# Altium PCB PCB1.PcbDoc (part 3 of 3)
Units mm, origin at the board's own origin, x right, y up, seen from the top; angles counter-clockwise.
Board outline 201 x 61 mm, 2 copper layers (Top Layer, Bottom Layer); 203 components, 113 nets, 551 pads, 592 vias.
Unrouted connection lines stored in the file: 16.
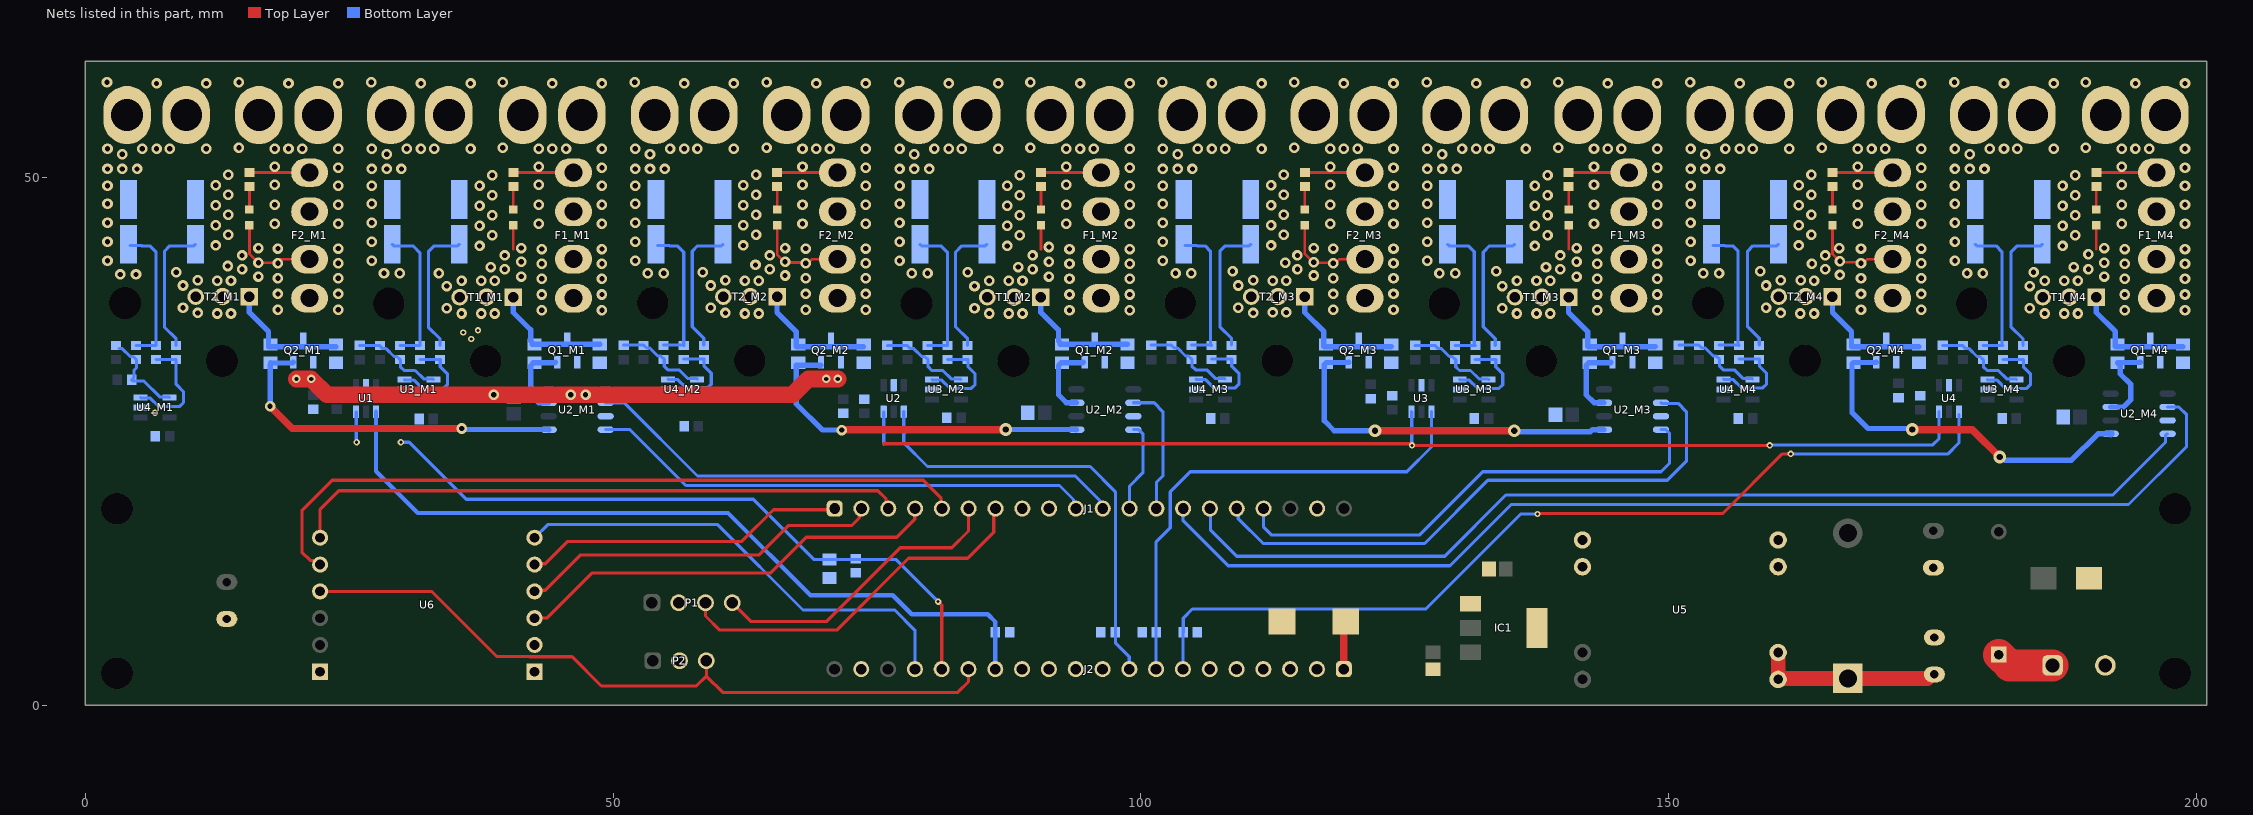
[diagram p2: the nets of this part, all layers, seen from the top]

## Via types
v1: diameter 1, hole 0.5, Top Layer to Bottom Layer, 557 vias
v2: diameter 0.6, hole 0.3, Top Layer to Bottom Layer, 26 vias
v3: diameter 1.2, hole 0.6, Top Layer to Bottom Layer, 5 vias
v4: diameter 0.8, hole 0.4, Top Layer to Bottom Layer, 4 vias

## Nets (pads, with @x,y where several pads share a name; then routed paths per layer and width w, separated by ;. In a path a pad name is that pad's centre, name@x,y a point inside that pad or via, vN(x,y) a via of type N, cw(c..) or ccw(c..) an arc to the next point about the centre after c; other vN are vias at no path point) (continued)
GND: C1_M1.1 C1_M2.1 C1_M3.1 C1_M4.1 C2_M1.1 C2_M2.1 C2_M3.1 C2_M4.1 C3_M1.1 C3_M2.1 C3_M3.1 C3_M4.1 C6.1 C7.1 C8.2 C9.2 C10.2 C11.2 C12.2 C13.2 C14.1 C15.2 C16.1 C17.1 C18.1 C19.1 C20.2 C21.1 C22.1 C23.2 C24.2 D5.1 IC1.1 IC1.4 J1.19 J2.19 J4.2 K1.1_M1.1 K1.1_M2.1 K1.1_M3.1 K1.1_M4.1 K1.2_M1.1 K1.2_M2.1 K1.2_M3.1 K1.2_M4.1 K2.1_M1.1 K2.1_M2.1 K2.1_M3.1 K2.1_M4.1 K2.2_M1.1 K2.2_M2.1 K2.2_M3.1 K2.2_M4.1 P1.2 P2.2 Q1_M1.1 Q1_M2.1 Q1_M3.1 Q1_M4.1 Q2_M1.1 Q2_M2.1 Q2_M3.1 Q2_M4.1 R3_M1.1 R3_M2.1 R3_M3.1 R3_M4.1 R4_M1.2 R4_M2.2 R4_M3.2 R4_M4.2 R5_M1.2 R5_M2.2 R5_M3.2 R5_M4.2 R8_M1.1 R8_M2.1 R8_M3.1 R8_M4.1 R9_M1.1 R9_M2.1 R9_M3.1 R9_M4.1 R13_M1.1 R13_M2.1 R13_M3.1 R13_M4.1 R14_M1.2 R14_M2.2 R14_M3.2 R14_M4.2 R15_M1.2 R15_M2.2 R15_M3.2 R15_M4.2 R16.1 R18_M1.1 R18_M2.1 R18_M3.1 R18_M4.1 R19_M1.1 R19_M2.1 R19_M3.1 R19_M4.1 U1.2 U2.2 U2_M1.3 U2_M2.3 U2_M3.3 U2_M4.3 U3.2 U3_M1.2 U3_M2.2 U3_M3.2 U3_M4.2 U4.2 U4_M1.2 U4_M2.2 U4_M3.2 U4_M4.2 U5.3 U5.4 U5.5 U5.6 U6.1 U6.2 U6.12 | length 163.1
  Top Layer w1.6: v4(20,30.9) v4(21.4,30.9) 22.9,29.4 v1(38.7,29.4) v1(46,29.4) v1(47.4,29.4) 67,29.4 68.5,30.9 v4(70.2,30.9) v4(71.3,30.9)
  Bottom Layer w0.3: R15_M1.2@4.225,43.55 5.3,43.55 5.35,43.5 6.1,43.5 6.7,42.9 6.7,34.05 R19_M1.1@4.8,34.05 ; R4_M1.2@29.075,43.65 29.225,43.5 31.05,43.5 31.7,42.85 R8_M1.1@31.7,34.05 R9_M1.1@29.8,34.05 ; R15_M2.2@54.225,43.55 55.3,43.55 55.35,43.5 56.1,43.5 56.7,42.9 R18_M2.1@56.7,34.1 ; R19_M2.1@54.8,34.1 R18_M2.1@56.7,34.1 ; R18_M2.1@56.7,34.05 R18_M2.1@56.7,34.1 ; R4_M2.2@79.075,43.65 79.225,43.5 81.05,43.5 81.7,42.85 R8_M2.1@81.7,34.05 R9_M2.1@79.8,34.05 ; R15_M3.2@104.225,43.55 105.3,43.55 105.35,43.5 106.1,43.5 106.6,43 106.6,34.15 R18_M3.1@106.65,34.1 ; R19_M3.1@104.8,34.1 R18_M3.1@106.65,34.1 ; R18_M3.1@106.7,34.05 R18_M3.1@106.65,34.1 ; R18_M3.1@106.7,34.1 R18_M3.1@106.65,34.1 ; R4_M3.2@129.075,43.65 129.225,43.5 131.05,43.5 131.6,42.95 131.6,34.15 R8_M3.1@131.7,34.05 R9_M3.1@129.8,34.05 ; R15_M4.2@154.225,43.55 155.3,43.55 155.35,43.5 156.1,43.5 156.6,43 156.6,34.15 R18_M4.1@156.65,34.1 ; R19_M4.1@154.8,34.1 R18_M4.1@156.65,34.1 ; R18_M4.1@156.7,34.05 R18_M4.1@156.65,34.1 ; R18_M4.1@156.7,34.1 R18_M4.1@156.65,34.1 ; R4_M4.2@179.075,43.65 179.225,43.5 181.05,43.5 181.6,42.95 181.6,34.15 R8_M4.1@181.7,34.05 R9_M4.1@179.8,34.05
  Bottom Layer w0.7: v1@38.7,29.343 40.457,29.343 C1_M1.1@40.6,29.2
  other v1: 3.3,40.8 4.8,40.8 28.3,40.9 29.8,40.9 53.3,40.9 54.8,40.9 78.3,40.9 79.8,40.9 103.3,40.9 104.8,40.9 128.3,40.9 129.8,40.9 153.3,40.9 154.8,40.9 178.3,40.9 179.8,40.9 2.1,42.1 27.15,42.1 52.1,42.1 77.15,42.1 102.1,42.1 127.15,42.1 152.1,42.1 177.15,42.1 2.1,43.9 27.15,43.9 52.1,43.9 77.15,43.9 102.1,43.9 127.15,43.9 152.1,43.9 177.15,43.9 2.1,45.7 27.15,45.7 52.1,45.7 77.15,45.7 102.1,45.7 127.15,45.7 152.1,45.7 177.15,45.7 2.1,47.5 27.15,47.5 52.1,47.5 77.15,47.5 102.1,47.5 127.15,47.5 152.1,47.5 177.15,47.5 2.1,49.2 27.15,49.2 52.1,49.2 77.15,49.2 102.1,49.2 127.15,49.2 152.1,49.2 177.15,49.2 2.1,50.8 3.5,50.8 4.9,50.8 27.15,50.8 28.55,50.8 29.95,50.8 52.1,50.8 53.5,50.8 54.9,50.8 77.15,50.8 78.55,50.8 79.95,50.8 102.1,50.8 103.5,50.8 104.9,50.8 127.15,50.8 128.55,50.8 129.95,50.8 152.1,50.8 153.5,50.8 154.9,50.8 177.15,50.8 178.55,50.8 179.95,50.8 3.5,52.2 28.55,52.2 53.5,52.2 78.55,52.2 103.5,52.2 128.55,52.2 153.5,52.2 178.55,52.2 2.1,52.7 5.4,52.7 6.75,52.7 8,52.7 11.45,52.7 27.15,52.7 30.45,52.7 31.8,52.7 33.05,52.7 36.5,52.7 52.1,52.7 55.4,52.7 56.75,52.7 58,52.7 61.45,52.7 77.15,52.7 80.45,52.7 81.8,52.7 83.05,52.7 86.5,52.7 102.1,52.7 105.4,52.7 106.75,52.7 108,52.7 111.45,52.7 127.15,52.7 130.45,52.7 131.8,52.7 133.05,52.7 136.5,52.7 152.1,52.7 155.4,52.7 156.75,52.7 158,52.7 161.45,52.7 177.15,52.7 180.45,52.7 181.8,52.7 183.05,52.7 186.5,52.7 6.75,58.9 11.45,58.9 31.8,58.9 36.5,58.9 56.75,58.9 61.45,58.9 81.8,58.9 86.5,58.9 106.75,58.9 111.45,58.9 131.8,58.9 136.5,58.9 156.75,58.9 161.45,58.9 181.8,58.9 186.5,58.9 2.05,59 27.1,59 52.05,59 77.1,59 102.05,59 127.1,59 152.05,59 177.1,59
  other v2: 6.6,27.7 36.561,34.679 35.8,35.3 37.2,35.5
NetA1.1_M1_1: A1.1_M1.1 A1.2_M1.1 F1_M1.2 F1_M1.4 R6_M1.2 | length 5.7
  Top Layer w0.254: R6_M1.2@40.55,50.45 F1_M1.4@46.25,50.45
  other v1: 42.95,45.6 48.95,45.6 42.95,47.4 48.95,47.4 48.95,49.2 42.95,49.3 48.95,50.9 42.95,51 42.95,52.7 44.25,52.7 45.55,52.7 48.95,52.7 39.55,52.8 44.25,58.9 48.95,58.9 39.55,59
NetA1.1_M2_1: A1.1_M2.1 A1.2_M2.1 F1_M2.2 F1_M2.4 R6_M2.2 | length 5.7
  Top Layer w0.254: R6_M2.2@90.55,50.45 F1_M2.4@96.25,50.45
  other v1: 92.95,45.6 98.95,45.6 92.95,47.4 98.95,47.4 98.95,49.2 92.95,49.3 98.95,50.9 92.95,51 92.95,52.7 94.25,52.7 95.55,52.7 98.95,52.7 89.55,52.8 94.25,58.9 98.95,58.9 89.55,59
NetA1.1_M3_1: A1.1_M3.1 A1.2_M3.1 F1_M3.2 F1_M3.4 R6_M3.2 | length 5.7
  Top Layer w0.254: R6_M3.2@140.55,50.45 F1_M3.4@146.25,50.45
  other v1: 142.95,45.6 148.95,45.6 142.95,47.4 148.95,47.4 148.95,49.2 142.95,49.3 148.95,50.9 142.95,51 142.95,52.7 144.25,52.7 145.55,52.7 148.95,52.7 139.55,52.8 144.25,58.9 148.95,58.9 139.55,59
NetA1.1_M4_1: A1.1_M4.1 A1.2_M4.1 F1_M4.2 F1_M4.4 R6_M4.2 | length 5.7
  Top Layer w0.254: R6_M4.2@190.55,50.45 F1_M4.4@196.25,50.45
  other v1: 192.95,45.6 198.95,45.6 192.95,47.4 198.95,47.4 198.95,49.2 192.95,49.3 198.95,50.9 192.95,51 192.95,52.7 194.25,52.7 195.55,52.7 198.95,52.7 189.55,52.8 194.25,58.9 198.95,58.9 189.55,59
NetA2.1_M1_1: A2.1_M1.1 A2.2_M1.1 F2_M1.2 F2_M1.4 R7_M1.2 | length 5.7
  Top Layer w0.254: R7_M1.2@15.55,50.45 F2_M1.4@21.25,50.45
  other v1: 17.95,45.6 23.95,45.6 17.95,47.4 23.95,47.4 23.95,49.2 17.95,49.3 23.95,50.9 17.95,51 17.95,52.7 19.25,52.7 20.55,52.7 23.95,52.7 14.55,52.8 19.25,58.9 23.95,58.9 14.55,59
NetA2.1_M2_1: A2.1_M2.1 A2.2_M2.1 F2_M2.2 F2_M2.4 R7_M2.2 | length 5.7
  Top Layer w0.254: R7_M2.2@65.55,50.45 F2_M2.4@71.25,50.45
  other v1: 67.95,45.6 73.95,45.6 67.95,47.4 73.95,47.4 73.95,49.2 67.95,49.3 73.95,50.9 67.95,51 67.95,52.7 69.25,52.7 70.55,52.7 73.95,52.7 64.55,52.8 69.25,58.9 73.95,58.9 64.55,59
NetA2.1_M3_1: A2.1_M3.1 A2.2_M3.1 F2_M3.2 F2_M3.4 R7_M3.2 | length 5.7
  Top Layer w0.254: R7_M3.2@115.55,50.45 F2_M3.4@121.25,50.45
  other v1: 117.95,45.6 123.95,45.6 117.95,47.4 123.95,47.4 123.95,49.2 117.95,49.3 123.95,50.9 117.95,51 117.95,52.7 119.25,52.7 120.55,52.7 123.95,52.7 114.55,52.8 119.25,58.9 123.95,58.9 114.55,59
NetA2.1_M4_1: A2.1_M4.1 A2.2_M4.1 F2_M4.2 F2_M4.4 R7_M4.2 | length 5.7
  Top Layer w0.254: R7_M4.2@165.55,50.45 F2_M4.4@171.25,50.45
  other v1: 167.95,45.6 173.95,45.6 167.95,47.4 173.95,47.4 173.95,49.2 167.95,49.3 173.95,50.9 167.95,51 167.95,52.7 169.25,52.7 170.55,52.7 173.95,52.7 164.55,52.8 169.25,58.9 173.95,58.9 164.55,59
NetC4_M1_1: C4_M1.1 R9_M1.2 R10_M1.1 U3_M1.4 | length 8.7
  Bottom Layer w0.3: C4_M1.1@26,34.075 26.025,34.05 R10_M1.1@27.9,34.05 28.175,33.775 28.495,33.775 29.245,33.025 29.525,33.025 29.849,32.701 29.849,32.051 30.2,31.7 31.25,31.7 32.053,30.897 32.914,30.897 U3_M1.4@32.972,30.84
NetC4_M2_1: C4_M2.1 R9_M2.2 R10_M2.1 U3_M2.4 | length 8.7
  Bottom Layer w0.3: C4_M2.1@76,34.075 76.025,34.05 77.9,34.05 78.175,33.775 78.495,33.775 79.245,33.025 79.525,33.025 79.849,32.701 79.849,32.051 80.2,31.7 81.25,31.7 82.053,30.897 82.914,30.897 U3_M2.4@82.972,30.84
NetC4_M3_1: C4_M3.1 R9_M3.2 R10_M3.1 U3_M3.4 | length 8.7
  Bottom Layer w0.3: C4_M3.1@126,34.075 126.025,34.05 R10_M3.1@127.9,34.05 128.175,33.775 128.495,33.775 129.245,33.025 129.525,33.025 129.849,32.701 129.849,32.051 130.2,31.7 131.25,31.7 132.053,30.897 132.914,30.897 U3_M3.4@132.972,30.84
NetC4_M4_1: C4_M4.1 R9_M4.2 R10_M4.1 U3_M4.4 | length 8.7
  Bottom Layer w0.3: C4_M4.1@176,34.075 176.025,34.05 R10_M4.1@177.9,34.05 178.175,33.775 178.495,33.775 179.245,33.025 179.525,33.025 179.849,32.701 179.849,32.051 180.2,31.7 181.25,31.7 182.053,30.897 182.914,30.897 U3_M4.4@182.972,30.84
NetC5_M1_1: C5_M1.1 R19_M1.2 R20_M1.1 U4_M1.4 | length 8.5
  Bottom Layer w0.3: R20_M1.1@3.175,33.775 3.495,33.775 4.245,33.025 4.525,33.025 R19_M1.2@4.8,32.75 4.849,32.701 4.849,31.949 4.6,31.7 4.6,31.025 C5_M1.1@4.375,30.8 4.475,30.7 5.55,30.7 7.053,29.197 7.914,29.197 U4_M1.4@7.972,29.14
NetC5_M2_1: C5_M2.1 R19_M2.2 R20_M2.1 U4_M2.4 | length 8.7
  Bottom Layer w0.3: C5_M2.1@51,34.125 51.025,34.1 52.9,34.1 53.175,33.825 53.495,33.825 54.245,33.075 54.525,33.075 54.849,32.751 54.849,32.101 55.2,31.75 56.25,31.75 57.053,30.947 57.914,30.947 U4_M2.4@57.972,30.89
NetC5_M3_1: C5_M3.1 R19_M3.2 R20_M3.1 U4_M3.4 | length 17.4
  Bottom Layer w0.3: C5_M3.1@101.025,34.1 R20_M3.1@102.9,34.1 ; C5_M3.1@101.025,34.1 101,34.125 C5_M3.1@101.025,34.1 ; C5_M3.1@101.025,34.1 R20_M3.1@102.9,34.1 ; R20_M3.1@102.9,34.1 R20_M3.1@103.175,33.825 ; R20_M3.1@102.9,34.1 R20_M3.1@103.175,33.825 ; R20_M3.1@103.175,33.825 103.495,33.825 ; R20_M3.1@103.175,33.825 103.495,33.825 ; 103.495,33.825 104.245,33.075 ; 103.495,33.825 104.245,33.075 ; 104.245,33.075 R19_M3.2@104.525,33.075 ; 104.245,33.075 R19_M3.2@104.525,33.075 ; R19_M3.2@104.525,33.075 R19_M3.2@104.849,32.751 ; R19_M3.2@104.525,33.075 R19_M3.2@104.849,32.751 ; 104.849,32.101 R19_M3.2@104.849,32.751 ; 104.849,32.101 105.2,31.75 ; 104.849,32.101 R19_M3.2@104.849,32.751 ; 104.849,32.101 105.2,31.75 ; 105.2,31.75 106.25,31.75 ; 105.2,31.75 106.25,31.75 ; 106.25,31.75 107.053,30.947 ; 106.25,31.75 107.053,30.947 ; 107.053,30.947 U4_M3.4@107.914,30.947 ; 107.053,30.947 U4_M3.4@107.914,30.947 ; U4_M3.4@107.914,30.947 107.972,30.89 U4_M3.4@107.914,30.947
NetC5_M4_1: C5_M4.1 R19_M4.2 R20_M4.1 U4_M4.4 | length 17.4
  Bottom Layer w0.3: C5_M4.1@151.025,34.1 151,34.125 C5_M4.1@151.025,34.1 ; C5_M4.1@151.025,34.1 R20_M4.1@152.9,34.1 ; C5_M4.1@151.025,34.1 R20_M4.1@152.9,34.1 ; R20_M4.1@152.9,34.1 R20_M4.1@153.175,33.825 ; R20_M4.1@152.9,34.1 R20_M4.1@153.175,33.825 ; R20_M4.1@153.175,33.825 153.495,33.825 ; R20_M4.1@153.175,33.825 153.495,33.825 ; 153.495,33.825 154.245,33.075 ; 153.495,33.825 154.245,33.075 ; 154.245,33.075 R19_M4.2@154.525,33.075 ; 154.245,33.075 R19_M4.2@154.525,33.075 ; R19_M4.2@154.525,33.075 R19_M4.2@154.849,32.751 ; R19_M4.2@154.525,33.075 R19_M4.2@154.849,32.751 ; 154.849,32.101 155.2,31.75 ; 154.849,32.101 R19_M4.2@154.849,32.751 ; 154.849,32.101 155.2,31.75 ; 154.849,32.101 R19_M4.2@154.849,32.751 ; 155.2,31.75 156.25,31.75 ; 155.2,31.75 156.25,31.75 ; 156.25,31.75 157.053,30.947 ; 156.25,31.75 157.053,30.947 ; 157.053,30.947 U4_M4.4@157.914,30.947 ; 157.053,30.947 U4_M4.4@157.914,30.947 ; U4_M4.4@157.914,30.947 157.972,30.89 U4_M4.4@157.914,30.947
NetC15_1: C15.1 D4.2 U5.1 U5.2 | length 17.5
  Top Layer w1.4: U5.2@160.4,4.972 U5.1@160.4,2.432 160.468,2.432 160.556,2.52 D4.2@167,2.52 174.543,2.52 174.923,2.9 C15.1@175.2,2.9
NetD1_M1_1: D1_M1.1 R6_M1.1 | length 2.2
  Top Layer w0.254: D1_M1.1@40.55,46.95 R6_M1.1@40.55,49.15
NetD1_M1_2: D1_M1.2 F1_M1.1 F1_M1.3 T1_M1.2 | length 2.7
  Top Layer w0.254: 40.55,43.2 D1_M1.2@40.55,45.45 ; v1@43.048,41.8 v1@43.452,41.8
  other v1: 37.5,37.1 38.8,37.1 43.25,37.4 48.95,37.4 43.25,38.9 48.95,38.9 37.5,40.2 38.8,40.2 43.25,40.4 48.95,40.4 41.3,40.6 39.75,41.3 38.4,41.5 43.25,41.8 48.95,41.8 41.3,42 39.75,42.6 43.25,43.2 48.95,43.2 41.3,43.3
NetD1_M2_1: D1_M2.1 R6_M2.1 | length 2.2
  Top Layer w0.254: D1_M2.1@90.55,46.95 R6_M2.1@90.55,49.15
NetD1_M2_2: D1_M2.2 F1_M2.1 F1_M2.3 T1_M2.2 | length 3.1
  Top Layer w0.254: 90.55,43.2 D1_M2.2@90.55,45.45 ; v1@93.048,41.8 93.452,41.8 v1@93.048,41.8
  other v1: 87.5,37.1 88.8,37.1 93.25,37.4 98.95,37.4 93.25,38.9 98.95,38.9 87.5,40.2 88.8,40.2 93.25,40.4 98.95,40.4 91.3,40.6 89.75,41.3 88.4,41.5 93.25,41.8 98.95,41.8 91.3,42 89.75,42.6 93.25,43.2 98.95,43.2 91.3,43.4
NetD1_M3_1: D1_M3.1 R6_M3.1 | length 2.2
  Top Layer w0.254: D1_M3.1@140.55,46.95 R6_M3.1@140.55,49.15
NetD1_M3_2: D1_M3.2 F1_M3.1 F1_M3.3 T1_M3.2 | length 2.7
  Top Layer w0.254: 140.55,43.2 D1_M3.2@140.55,45.45 ; v1@143.048,41.8 v1@143.452,41.8
  other v1: 137.5,37.1 138.8,37.1 143.25,37.4 148.95,37.4 143.25,38.9 148.95,38.9 137.5,40.2 138.8,40.2 143.25,40.4 148.95,40.4 141.3,40.6 139.75,41.3 138.4,41.5 143.25,41.8 148.95,41.8 141.3,42 139.75,42.6 143.25,43.2 148.95,43.2 141.3,43.3
NetD1_M4_1: D1_M4.1 R6_M4.1 | length 2.2
  Top Layer w0.254: D1_M4.1@190.55,46.95 R6_M4.1@190.55,49.15
NetD1_M4_2: D1_M4.2 F1_M4.1 F1_M4.3 T1_M4.2 | length 2.7
  Top Layer w0.254: 190.55,43.2 D1_M4.2@190.55,45.45 ; v1@193.048,41.8 v1@193.452,41.8
  other v1: 187.5,37.1 188.8,37.1 193.25,37.4 198.95,37.4 193.25,38.9 198.95,38.9 187.5,40.2 188.8,40.2 193.25,40.4 198.95,40.4 191.3,40.6 189.8,41.3 188.4,41.5 193.25,41.8 198.95,41.8 191.3,41.9 189.8,42.7 193.25,43.2 198.95,43.2 191.3,43.3
NetD2_M1_1: D2_M1.1 R7_M1.1 | length 2.2
  Top Layer w0.254: D2_M1.1@15.55,46.95 R7_M1.1@15.55,49.15
NetD2_M1_2: D2_M1.2 F2_M1.1 F2_M1.3 T2_M1.2 | length 8.9
  Top Layer w0.254: D2_M1.2@15.55,45.45 15.55,42.75 v1(16.4,41.9) 17.9,41.9 18.25,42.25 F2_M1.3@21.25,42.25
  other v1: 12.5,37.1 13.8,37.1 18.25,37.45 23.95,37.45 18.25,38.95 23.95,38.95 12.5,40.2 13.8,40.2 18.25,40.45 23.95,40.45 16.4,40.6 14.85,41.3 13.5,41.6 18.25,41.85 23.95,41.85 14.85,42.6 18.25,43.25 23.95,43.25 16.4,43.3
NetD2_M2_1: D2_M2.1 R7_M2.1 | length 2.2
  Top Layer w0.254: D2_M2.1@65.55,46.95 R7_M2.1@65.55,49.15
NetD2_M2_2: D2_M2.2 F2_M2.1 F2_M2.3 T2_M2.2 | length 8.9
  Top Layer w0.254: D2_M2.2@65.55,45.45 65.55,42.676 66.226,42 v1(66.3,42) 66.375,41.925 68.04,41.925 68.107,41.993 68.595,41.993 68.852,42.25 F2_M2.3@71.25,42.25
  other v1: 62.5,37.1 63.8,37.1 68.25,37.45 73.95,37.45 68.25,38.95 73.95,38.95 62.5,40.2 63.8,40.2 68.25,40.45 73.95,40.45 66.3,40.7 64.85,41.3 63.5,41.7 68.25,41.85 73.95,41.85 64.85,42.6 68.25,43.25 73.95,43.25 66.3,43.3
NetD2_M3_1: D2_M3.1 R7_M3.1 | length 2.2
  Top Layer w0.254: D2_M3.1@115.55,46.95 R7_M3.1@115.55,49.15
NetD2_M3_2: D2_M3.2 F2_M3.1 F2_M3.3 T2_M3.2 | length 8.9
  Top Layer w0.254: D2_M3.2@115.55,45.45 115.55,42.75 116.337,41.962 v1(116.387,41.962) 116.444,41.906 118.021,41.906 118.107,41.993 118.595,41.993 118.852,42.25 F2_M3.3@121.25,42.25
  other v1: 112.5,37.2 113.8,37.2 118.25,37.45 123.95,37.45 118.25,38.95 123.95,38.95 112.5,40.2 113.8,40.2 118.25,40.45 123.95,40.45 116.4,40.7 114.85,41.3 118.25,41.85 123.95,41.85 113.7,41.9 114.85,42.6 118.25,43.25 123.95,43.25 116.4,43.3
NetD2_M4_1: D2_M4.1 R7_M4.1 | length 2.2
  Top Layer w0.254: D2_M4.1@165.55,46.95 R7_M4.1@165.55,49.15
NetD2_M4_2: D2_M4.2 F2_M4.1 F2_M4.3 T2_M4.2 | length 8.9
  Top Layer w0.254: D2_M4.2@165.55,45.45 165.55,42.75 166.35,41.95 167.95,41.95 168.05,42.05 168.107,41.993 168.595,41.993 168.852,42.25 F2_M4.3@171.25,42.25
  other v1: 162.5,37.1 163.8,37.1 168.25,37.45 173.95,37.45 168.25,38.95 173.95,38.95 163.8,40.2 162.55,40.25 168.25,40.45 173.95,40.45 166.25,40.75 164.85,41.3 163.6,41.8 168.25,41.85 173.95,41.85 166.25,42.05 164.85,42.6 168.25,43.25 173.95,43.25 166.2,43.3
NetF1_1: F1.1 J4.1 | length 5.5
  Top Layer w3: F1.1@181.3,4.775 182.325,3.75 J4.1@186.4,3.75
NetQ1_M1_3: Q1_M1.3 R1_M1.2 R3_M1.2 T1_M1.1 | length 11.8
  Bottom Layer w0.5: T1_M1.1@40.54,38.7 40.54,37.21 42.2,35.55 42.2,34.5 42.525,34.175 R1_M1.2@42.55,34.175 ; R1_M1.2@42.35,34.175 R3_M1.2@48.75,34.175
NetQ1_M2_3: Q1_M2.3 R1_M2.2 R3_M2.2 T1_M2.1 | length 11.8
  Bottom Layer w0.5: T1_M2.1@90.54,38.7 90.54,37.21 92.2,35.55 92.2,34.5 92.525,34.175 R1_M2.2@92.55,34.175 ; R1_M2.2@92.35,34.175 R3_M2.2@98.75,34.175
NetQ1_M3_3: Q1_M3.3 R1_M3.2 R3_M3.2 T1_M3.1 | length 11.8
  Bottom Layer w0.5: T1_M3.1@140.54,38.7 140.54,37.21 142.35,35.4 R1_M3.2@142.35,33.975 ; R1_M3.2@142.375,33.95 145.425,33.95 ; 145.45,33.925 145.475,33.95 148.725,33.95 R3_M3.2@148.75,33.975
NetQ1_M4_3: Q1_M4.3 R1_M4.2 R3_M4.2 T1_M4.1 | length 11.8
  Bottom Layer w0.5: T1_M4.1@190.54,38.7 190.54,37.21 192.35,35.4 R1_M4.2@192.35,33.975 ; R1_M4.2@192.375,33.95 195.425,33.95 ; 195.45,33.925 195.475,33.95 198.725,33.95 R3_M4.2@198.75,33.975
NetQ2_M1_3: Q2_M1.3 R11_M1.2 R13_M1.2 T2_M1.1 | length 11.7
  Bottom Layer w0.5: T2_M1.1@15.54,38.7 15.54,37.21 17.35,35.4 17.35,33.975 R11_M1.2@17.375,33.95 ; R11_M1.2@17.575,33.95 R13_M1.2@23.725,33.95
NetQ2_M2_3: Q2_M2.3 R11_M2.2 R13_M2.2 T2_M2.1 | length 11.7
  Bottom Layer w0.5: T2_M2.1@65.54,38.7 65.54,37.21 67.35,35.4 67.35,33.975 R11_M2.2@67.375,33.95 ; R11_M2.2@67.575,33.95 R13_M2.2@73.725,33.95
NetQ2_M3_3: Q2_M3.3 R11_M3.2 R13_M3.2 T2_M3.1 | length 11.9
  Bottom Layer w0.5: T2_M3.1@115.54,38.7 115.54,37.21 117.35,35.4 117.35,33.975 117.375,33.95 120.425,33.95 120.45,33.925 120.475,33.95 123.725,33.95 R13_M3.2@123.75,33.975
NetQ2_M4_3: Q2_M4.3 R11_M4.2 R13_M4.2 T2_M4.1 | length 11.9
  Bottom Layer w0.5: T2_M4.1@165.54,38.7 165.54,37.21 167.35,35.4 167.35,33.975 167.375,33.95 170.425,33.95 170.45,33.925 170.475,33.95 173.725,33.95 R13_M4.2@173.75,33.975
NetR2_M1_1: R2_M1.1 R4_M1.1 R5_M1.1 T1_M1.3 | length 12.6
  Bottom Layer w0.3: R2_M1.1@33.6,34.05 33.6,34.7 32.5,35.8 32.5,42.95 33.05,43.5 35.275,43.5 R4_M1.1@35.425,43.65
  other v1: 35.65,37.1 34.25,37.6 34.25,39.7 35.65,40.2 33.5,40.9 37.35,43.5 38.55,44.5 37.35,45.4 38.55,46.4 37.35,47.3 38.55,48.3 37.35,49.2 38.55,50.2
NetR2_M1_2: R2_M1.2 R8_M1.2 U3_M1.3 | length 9.2
  Bottom Layer w0.3: U3_M1.3@30.228,30.84 30.286,30.783 31.147,30.783 31.93,30 33.95,30 34.3,30.35 34.3,31.384 33.633,32.051 33.633,32.717 R2_M1.2@33.6,32.75 R8_M1.2@31.7,32.75
NetR2_M2_1: R2_M2.1 R4_M2.1 R5_M2.1 T1_M2.3 | length 12.6
  Bottom Layer w0.3: R2_M2.1@83.6,34.05 83.6,34.7 82.45,35.85 82.45,42.9 83.05,43.5 85.275,43.5 R4_M2.1@85.425,43.65
  other v1: 85.65,37.1 84.25,37.6 84.25,39.7 85.65,40.2 83.6,41 87.35,43.5 88.55,44.5 87.35,45.4 88.55,46.4 87.35,47.3 88.55,48.3 87.35,49.2 88.55,50.2
NetR2_M2_2: R2_M2.2 R8_M2.2 U3_M2.3 | length 9.2
  Bottom Layer w0.3: U3_M2.3@80.228,30.84 80.286,30.783 81.147,30.783 81.93,30 83.95,30 84.3,30.35 84.3,31.384 83.633,32.051 83.633,32.717 R2_M2.2@83.6,32.75 R8_M2.2@81.7,32.75
NetR2_M3_1: R2_M3.1 R4_M3.1 R5_M3.1 T1_M3.3 | length 15.6
  Bottom Layer w0.3: 132.45,39.9 132.45,42.9 ; R2_M3.1@133.6,34.05 133.6,34.7 132.45,35.85 132.45,42.9 ; R4_M3.1@135.425,43.65 135.275,43.5 133.05,43.5 132.45,42.9
  other v1: 135.65,37.1 134.25,37.6 134.25,39.7 135.65,40.2 133.7,41.1 137.35,43.5 138.55,44.5 137.35,45.4 138.55,46.4 137.35,47.3 138.55,48.3 137.35,49.2 138.55,50.2
NetR2_M3_2: R2_M3.2 R8_M3.2 U3_M3.3 | length 9.2
  Bottom Layer w0.3: U3_M3.3@130.228,30.84 130.286,30.783 131.147,30.783 131.93,30 133.95,30 134.3,30.35 134.3,31.384 133.633,32.051 133.633,32.717 R2_M3.2@133.6,32.75 R8_M3.2@131.7,32.75
NetR2_M4_1: R2_M4.1 R4_M4.1 R5_M4.1 T1_M4.3 | length 15.6
  Bottom Layer w0.3: 182.45,39.9 182.45,42.9 ; R2_M4.1@183.6,34.05 183.6,34.7 182.45,35.85 182.45,42.9 ; R4_M4.1@185.425,43.65 185.275,43.5 183.05,43.5 182.45,42.9
  other v1: 185.65,37.1 184.25,37.6 184.25,39.7 185.65,40.2 184.6,41 187.35,43.5 188.55,44.5 187.35,45.4 188.55,46.4 187.35,47.3 188.55,48.3 187.35,49.2 188.55,50.2
NetR2_M4_2: R2_M4.2 R8_M4.2 U3_M4.3 | length 9.2
  Bottom Layer w0.3: U3_M4.3@180.228,30.84 180.286,30.783 181.147,30.783 181.93,30 183.95,30 184.3,30.35 184.3,31.384 183.633,32.051 183.633,32.717 R2_M4.2@183.6,32.75 R8_M4.2@181.7,32.75
NetR12_M1_1: R12_M1.1 R14_M1.1 R15_M1.1 T2_M1.3 | length 12.6
  Bottom Layer w0.3: R12_M1.1@8.6,34.05 8.6,34.7 7.5,35.8 7.5,43 8,43.5 10.275,43.5 R15_M1.1@10.425,43.65
  other v1: 10.65,37.15 9.25,37.65 9.25,39.75 10.65,40.25 8.6,41 12.35,43.55 13.55,44.55 12.35,45.45 13.55,46.45 12.35,47.35 13.55,48.35 12.35,49.25 13.55,50.25
NetR12_M1_2: R12_M1.2 R18_M1.2 U4_M1.3 | length 10.9
  Bottom Layer w0.3: U4_M1.3@5.228,29.14 5.286,29.083 6.147,29.083 6.93,28.3 8.95,28.3 9.3,28.65 9.3,29.7 8.6,30.4 R12_M1.2@8.6,32.75 R18_M1.2@6.7,32.75
NetR12_M2_1: R12_M2.1 R14_M2.1 R15_M2.1 T2_M2.3 | length 12.5
  Bottom Layer w0.3: R12_M2.1@58.6,34.1 58.6,34.75 57.5,35.85 57.5,43 58,43.5 60.275,43.5 R15_M2.1@60.425,43.65
  other v1: 60.65,37.15 59.25,37.65 59.25,39.75 60.65,40.25 58.5,41 62.35,43.55 63.55,44.55 62.35,45.45 63.55,46.45 62.35,47.35 63.55,48.35 62.35,49.25 63.55,50.25
NetR12_M2_2: R12_M2.2 R18_M2.2 U4_M2.3 | length 9.2
  Bottom Layer w0.3: U4_M2.3@55.228,30.89 55.286,30.833 56.147,30.833 56.93,30.05 58.95,30.05 59.3,30.4 59.3,31.434 58.633,32.101 58.633,32.767 58.6,32.8 R18_M2.2@56.7,32.8
NetR12_M3_1: R12_M3.1 R14_M3.1 R15_M3.1 T2_M3.3 | length 12.5
  Bottom Layer w0.3: R12_M3.1@108.6,34.1 108.6,34.75 107.5,35.85 107.5,43 108,43.5 110.275,43.5 R15_M3.1@110.425,43.65
  other v1: 110.65,37.15 109.25,37.65 109.25,39.75 110.65,40.25 108.7,41.1 112.35,43.55 113.55,44.55 112.35,45.45 113.55,46.45 112.35,47.35 113.55,48.35 112.35,49.25 113.55,50.25
NetR12_M3_2: R12_M3.2 R18_M3.2 U4_M3.3 | length 15.8
  Bottom Layer w0.3: U4_M3.3@105.286,30.833 105.228,30.89 U4_M3.3@105.286,30.833 ; U4_M3.3@105.286,30.833 106.147,30.833 ; U4_M3.3@105.286,30.833 106.147,30.833 ; 106.147,30.833 106.93,30.05 ; 106.147,30.833 106.93,30.05 ; 106.93,30.05 108.95,30.05 ; 106.93,30.05 108.95,30.05 ; R12_M3.2@108.6,32.8 106.7,32.8 R12_M3.2@108.6,32.8 ; R12_M3.2@108.6,32.8 R12_M3.2@108.633,32.767 ; R12_M3.2@108.6,32.8 R12_M3.2@108.633,32.767 ; 108.633,32.101 R12_M3.2@108.633,32.767 ; 108.633,32.101 R12_M3.2@108.633,32.767 ; 108.633,32.101 109.3,31.434 109.3,30.4 108.95,30.05
NetR12_M4_1: R12_M4.1 R14_M4.1 R15_M4.1 T2_M4.3 | length 12.5
  Bottom Layer w0.3: R12_M4.1@158.6,34.1 158.6,34.75 157.5,35.85 157.5,43 158,43.5 160.275,43.5 R15_M4.1@160.425,43.65
  other v1: 160.65,37.15 159.25,37.65 159.25,39.75 160.65,40.25 158.7,41.1 162.35,43.55 163.55,44.55 162.35,45.45 163.55,46.45 162.35,47.35 163.55,48.35 162.35,49.25 163.55,50.25
NetR12_M4_2: R12_M4.2 R18_M4.2 U4_M4.3 | length 15.8
  Bottom Layer w0.3: U4_M4.3@155.286,30.833 156.147,30.833 ; U4_M4.3@155.286,30.833 155.228,30.89 U4_M4.3@155.286,30.833 ; U4_M4.3@155.286,30.833 156.147,30.833 ; 156.147,30.833 156.93,30.05 ; 156.147,30.833 156.93,30.05 ; 156.93,30.05 158.95,30.05 ; 156.93,30.05 158.95,30.05 ; R12_M4.2@158.6,32.8 R12_M4.2@158.633,32.767 ; R12_M4.2@158.6,32.8 156.7,32.8 R12_M4.2@158.6,32.8 ; R12_M4.2@158.6,32.8 R12_M4.2@158.633,32.767 ; 158.633,32.101 159.3,31.434 159.3,30.4 158.95,30.05 ; 158.633,32.101 R12_M4.2@158.633,32.767 ; 158.633,32.101 R12_M4.2@158.633,32.767
NRST: J2.5
PA0_ADC0_key: J2.6
PA1_ADC1: C11.1 J2.9 U2.4 | length 42.3
  Bottom Layer w0.3: U2.4@77.55,27.795 77.55,24.85 79.8,22.6 95.2,22.6 97.6,20.2 97.6,6.9 97.6,5.9 98.92,4.58 J2.9@98.92,3.4
PA2_ADC2: C14.2 J2.8 U3.4 | length 47.2
  Bottom Layer w0.3: J2.8@101.46,3.4 101.46,6.625 101.46,15.46 102.8,16.8 102.8,20.2 104.7,22.1 125.2,22.1 127.55,24.45 127.55,24.85 127.55,27.507 U3.4@127.55,27.795
PA3_ADC3: C17.2 J2.7 U4.4 | length 87.9
  Top Layer w0.3: v2(137.6,18.1) 137.8,18.1 137.85,18.15 155.15,18.15 160.8,23.8 v2(161.6,23.8)
  Bottom Layer w0.3: J2.7@104,3.4 104,6.875 C17.2@104.025,6.9 104.025,8.225 104.9,9.1 127,9.1 136,18.1 v2(137.6,18.1) ; v2(161.6,23.8) 176.5,23.8 177.525,24.825 177.525,27.482 U4.4@177.55,27.507
PA4_ADC4_F_CS: J2.10
PA5_ADC5_SCK: J2.11
PA6_ADC6_MISO: J2.12
PA7_ADC7_MOSI: J2.13
PA8_ETH_RST: J1.5 U6.8 | length 69.6
  Top Layer w0.3: U6.8@22.24,13.31 21.909,13.31 21.519,13.7 21.3,13.7 20.521,14.479 20.521,18.421 23.4,21.3 79.4,21.3 81.064,19.636 81.064,18.716 J1.5@81.16,18.62
PA9_TX1: J1.6 P1.4 | length 28.8
  Top Layer w0.3: P1.4@61.3,9.7 63.1,7.9 70.2,7.9 77.2,14.9 82.1,14.9 83.686,16.486 83.686,18.606 J1.6@83.7,18.62
PA10_RX1: J1.7 P1.3 | length 35.3
  Top Layer w0.3: P1.3@58.76,9.7 58.76,8.44 60.1,7.1 71.2,7.1 78,13.9 83.6,13.9 86.074,16.374 86.074,18.454 J1.7@86.24,18.62
PA11_USB_DN: J1.8
PA12_USB_DP: J1.9
PA15_T2_CH1: J1.11 U2_M1.2 | length 51.5
  Bottom Layer w0.3: U2_M1.2@49.3,28.635 51.065,28.635 58,21.7 93.8,21.7 96.167,19.333 96.167,18.853 J1.11@96.4,18.62
PB0_ADC8: C8.1 J2.14 U1.4 | length 74.7
  Bottom Layer w0.4: U1.4@27.55,27.795 27.55,22.15 31.5,18.2 60.9,18.2 68.7,10.4 76.5,10.4 78.3,8.6 85.5,8.6 86.225,7.875 C8.1@86.225,6.9 ; J2.14@86.22,3.4 C8.1@86.22,6.9
PB1_ADC9: J2.15 P2.3 U6.9 | length 69.2
  Top Layer w0.3: U6.9@22.24,10.77 32.799,10.77 38.969,4.6 42.077,4.6 42.099,4.578 46.122,4.578 48.9,1.8 57.9,1.8 58.84,2.74 ; P2.3@58.84,4.2 58.84,2.74 ; J2.15@83.68,3.4 83.68,2.22 82.66,1.2 60.38,1.2 58.84,2.74
PB2_BOOT1: C20.1 J2.16 R16.2 U1.6 U2.6 U3.6 U4.6 | length 178.9
  Top Layer w0.3: v2(25.7,24.9) v2@25.75,24.85 ; 75.648,24.748 125.47,24.748 125.619,24.6 v2(125.7,24.6) 158.059,24.6 v2(159.6,24.6) ; v2(80.8,9.8) 81.14,9.46 J2.16@81.14,3.4
  Bottom Layer w0.3: U1.6@25.688,27.757 25.675,27.745 25.675,24.925 v2(25.7,24.9) ; v2(29.9,24.9) 30.681,24.9 36.081,19.5 63.3,19.5 69,13.8 70.5,13.8 71.1,13.8 73.6,13.8 76.8,13.8 79.632,10.968 v2(80.8,9.8) ; 75.649,24.749 U2.6@75.649,27.743 ; U3.6@125.65,27.795 U3.6@125.675,27.77 ; U3.6@125.675,27.745 U3.6@125.688,27.757 ; v2(159.6,24.6) 159.65,24.65 175.05,24.65 175.65,25.25 U4.6@175.65,27.795 ; v2@125.675,24.625 U3.6@125.675,27.77 ; v2@125.675,24.625 U3.6@125.675,27.77 ; v2@125.675,24.625 v2(125.7,24.6) v2@125.675,24.625
PB3_T2_CH2: J1.10 U2_M1.4 | length 48
  Bottom Layer w0.3: U2_M1.4@49.3,26.095 51.605,26.095 56.9,20.8 92.3,20.8 93.627,19.473 93.627,18.853 J1.10@93.86,18.62
PB4_T3_CH1: J1.13 U2_M2.2 | length 12.6
  Bottom Layer w0.3: U2_M2.2@99.3,28.635 101.265,28.635 102.1,27.8 102.1,21.7 101.48,21.08 J1.13@101.48,18.62
PB5_T3_CH2: J1.12 U2_M2.4 | length 8.7
  Bottom Layer w0.3: J1.12@98.94,18.62 98.94,20.74 100.2,22 100.2,25.7 99.805,26.095 U2_M2.4@99.3,26.095
PB6_T4_CH1: J1.16 U2_M3.2 | length 55.1
  Bottom Layer w0.3: J1.16@109.1,18.62 109.246,18.474 109.246,17.654 111.6,15.3 126.9,15.3 132.9,21.3 149.9,21.3 151.7,23.1 151.7,27.8 150.922,28.578 149.357,28.578 U2_M3.2@149.3,28.635
PB7_T4_CH2: J1.17 U2_M3.4 | length 47.2
  Bottom Layer w0.3: J1.17@111.64,18.62 111.64,16.86 112.4,16.1 126.4,16.1 132.4,22.1 149.3,22.1 150.1,22.9 150.1,25.769 149.774,26.095 U2_M3.4@149.3,26.095
PB8_T4_CH3: J1.14 U2_M4.2 | length 107.8
  Bottom Layer w0.3: J1.14@104.02,18.62 104,18.6 104,17.5 108.3,13.2 129.3,13.2 135.1,19 193.6,19 199.1,24.5 199.1,27.5 198.365,28.235 U2_M4.2@197.3,28.235
PB9_T4_CH4: J1.15 U2_M4.4 | length 99
  Bottom Layer w0.3: J1.15@106.56,18.62 106.6,18.58 106.6,16.6 109.1,14.1 128.8,14.1 134.6,19.9 192.1,19.9 197.1,24.9 197.1,25.556 197.239,25.695 U2_M4.4@197.3,25.695
PB10_ETH_INT: J2.17 U6.6 | length 44.4
  Bottom Layer w0.3: U6.6@42.56,15.85 43.802,17.092 59.908,17.092 68,9 76.7,9 78.6,7.1 J2.17@78.6,3.4
PB12_ETH_NSS2: J1.1 U6.5 | length 30.6
  Top Layer w0.3: U6.5@42.56,13.31 42.642,13.392 43.592,13.392 45.7,15.5 62.2,15.5 65.2,18.5 70.88,18.5 J1.1@71,18.62
PB13_ETH_SCK2: J1.2 U6.4 | length 34.6
  Top Layer w0.3: U6.4@42.56,10.77 42.662,10.872 43.572,10.872 46.9,14.2 63.8,14.2 66.6,17 72.6,17 73.324,17.724 73.324,18.404 J1.2@73.54,18.62
PB14_ETH_MISO2: J1.3 U6.7 | length 58.4
  Top Layer w0.3: U6.7@22.24,15.85 22.24,18.54 24,20.3 75.1,20.3 75.874,19.526 75.874,18.826 J1.3@76.08,18.62
PB15_ETH_MOSI2: J1.4 U6.3 | length 40.9
  Top Layer w0.3: U6.3@42.56,8.23 43.73,8.23 48,12.5 64.9,12.5 68.3,15.9 76.9,15.9 78.586,17.586 78.586,18.586 J1.4@78.62,18.62
PC13_led_blue: J2.2
PC14_OSC32_IN: J2.3
PC15_OSC32_OUT: J2.4
PWM_A_M1: Q1_M1.2 R1_M1.1 U2_M1.7 | length 7.2
  Bottom Layer w0.5: U2_M1.7@43.881,28.654 42.946,28.654 42.2,29.4 42.2,32.175 42.45,32.425 44.5,32.425 Q1_M1.2@44.55,32.475
PWM_A_M2: Q1_M2.2 R1_M2.1 U2_M2.7 | length 7.2
  Bottom Layer w0.5: U2_M2.7@93.881,28.654 92.946,28.654 92.2,29.4 92.2,32.175 92.45,32.425 94.5,32.425 Q1_M2.2@94.55,32.475
PWM_A_M3: Q1_M3.2 R1_M3.1 U2_M3.7 | length 7.2
  Bottom Layer w0.5: U2_M3.7@143.883,28.652 142.948,28.652 142.202,29.397 142.202,32.172 142.452,32.422 144.502,32.422 Q1_M3.2@144.552,32.472
PWM_A_M4: Q1_M4.2 R1_M4.1 U2_M4.7 | length 8.4
  Bottom Layer w0.5: U2_M4.7@191.9,28.235 193.135,28.235 193.8,28.9 193.8,30.4 192.807,31.393 192.807,32.168 R1_M4.1@192.55,32.425 192.575,32.45 194.675,32.45 Q1_M4.2@194.7,32.475
PWM_B_M1: Q2_M1.2 R11_M1.1 U2_M1.5 | length 33.5
  Top Layer w0.7: v1(17.5,28.3) 19.6,26.2 v1(35.662,26.2)
  Bottom Layer w0.5: v1(17.5,28.3) 17.525,28.325 17.525,32.2 R11_M1.1@17.5,32.225 ; R11_M1.1@17.55,32.425 17.575,32.4 19.65,32.4 19.7,32.45 Q2_M1.2@19.7,32.475 ; v1(35.662,26.2) 35.798,26.2 35.898,26.1 43.895,26.1 U2_M1.5@43.9,26.095
PWM_B_M2: Q2_M2.2 R11_M2.1 U2_M2.5 | length 33.4
  Top Layer w0.7: v1(71.675,26.05) 71.7,26.075 87.175,26.075 v3(87.2,26.1)
  Bottom Layer w0.5: R11_M2.1@67.35,32.225 67.35,28.55 69.85,26.05 v1(71.675,26.05) ; R11_M2.1@67.607,32.2 Q2_M2.2@69.7,32.2 ; v3(87.2,26.1) 87.202,26.098 93.898,26.098 U2_M2.5@93.9,26.095
PWM_B_M3: Q2_M3.2 R11_M3.1 U2_M3.5 | length 34.7
  Top Layer w0.7: v3(122.194,25.994) 122.197,25.997 135.397,25.997 v3(135.4,26)
  Bottom Layer w0.5: Q2_M3.2@119.7,32.475 119.675,32.45 117.575,32.45 R11_M3.1@117.55,32.425 117.4,32.275 117.4,26.935 118.342,25.994 v3(122.194,25.994) ; v3(135.4,26) 135.503,25.897 142.602,25.897 142.798,26.092 U2_M3.5@143.903,26.092
PWM_B_M4: Q2_M4.2 R11_M4.1 U2_M4.5 | length 34.4
  Top Layer w0.7: v3(173.1,26.1) 178.8,26.1 v3(181.4,23.5)
  Bottom Layer w0.5: Q2_M4.2@169.7,32.475 169.675,32.45 167.55,32.45 167.4,32.3 167.4,27.7 168.904,26.196 v3@173.004,26.196 ; v3(181.4,23.5) 181.589,23.5 181.889,23.2 188.2,23.2 190.695,25.695 U2_M4.5@191.9,25.695
  Bottom Layer w0.7: v3@173.004,26.196 v3(173.1,26.1) ; U2_M4.5@191.898,25.698 U2_M4.5@191.9,25.695
VBAT: C24.1 J2.1 | length 4.6
  Top Layer w0.7: J2.1@119.24,3.4 119.24,7.715 C24.1@119.425,7.9
pads on no net: J1.20 U2_M1.1 U2_M1.8 U2_M1.28 U2_M2.1 U2_M2.8 U2_M2.28 U2_M3.1 U2_M3.8 U2_M3.28 U2_M4.1 U2_M4.8 U2_M4.28
copper on no net: | length 0
  Top Layer w0.127: 98.93,7.9 98.95,7.9

## Polygon pours and split planes (outlines as drawn)
GND on Bottom Layer "GND_L02_P127" (solid, pour order 127): 70.7,33.4 74.9,33.4 74.9,31.4 72.9,31.4 71.7,30.2 69.3,30.2 69.3,31.6 70.7,31.6
GND on Bottom Layer "GND_L02_P125" (solid, pour order 125): 20.7,33.4 24.9,33.4 24.9,31 22.5,31 21.7,30.2 19.3,30.2 19.3,31.6 20.7,31.6
GND on Bottom Layer "GND_L02_P124" (solid, pour order 124): 45.4,33.4 49.8,33.4 49.8,30.7 48.007,30.7 48.007,28.1 49.8,28.1 50.1,28.1 50.1,26.6 45.4,26.6
GND on Bottom Layer "NONET_L02_P123" (solid, remove dead copper, shelved, pour order 123): 1,1 1,23.9 200,23.9 200,1
GND on Bottom Layer "NONET_L02_P119" (solid, remove dead copper, shelved, pour order 119): -0.2,35.4 -0.2,11.2 201.2,11.2 201.2,35.4
GND on Bottom Layer "GND_L02_P055" (solid, remove dead copper, pour order 55): 176.25,59.9 176.25,40.2 180.75,40.2 180.75,51.9 187.25,51.9 187.25,59.9
NetR2_M4_1 on Bottom Layer "NETR2_M4_1_L02_P059" (solid, remove dead copper, pour order 59): 183.45,50.9 189.25,50.9 189.25,44.1 186.45,41.3 186.45,36.4 183.45,36.4
NetD1_M4_2 on Bottom Layer "NETD1_M4_2_L02_P063" (solid, remove dead copper, pour order 63): 199.75,44 190.05,44 186.95,40.9 186.95,36.4 189.35,36.4 189.35,39.9 192.05,39.9 192.05,37.4 193.05,36.4 199.75,36.4
NetA1.1_M4_1 on Bottom Layer "NETA1.1_M4_1_L02_P067" (solid, remove dead copper, pour order 67): 188.75,59.9 199.75,59.9 199.75,44.9 191.75,44.9 191.75,51.9 188.75,51.9
NetR12_M4_1 on Bottom Layer "NETR12_M4_1_L02_P089" (solid, remove dead copper, pour order 89): 158.45,50.95 164.25,50.95 164.25,44.15 161.35,41.25 161.35,36.45 158.45,36.45
NetD2_M4_2 on Bottom Layer "NETD2_M4_2_L02_P093" (solid, remove dead copper, pour order 93): 174.75,44.05 165.05,44.05 161.95,40.95 161.95,36.45 164.35,36.45 164.35,39.95 167.05,39.95 167.05,37.45 168.05,36.45 174.75,36.45
NetA2.1_M4_1 on Bottom Layer "NETA2.1_M4_1_L02_P097" (solid, remove dead copper, pour order 97): 163.75,59.9 174.75,59.9 174.75,44.9 166.75,44.9 166.75,51.9 163.75,51.9
GND on Bottom Layer "GND_L02_P118" (solid, remove dead copper, pour order 118): 151.25,59.9 151.25,40.2 155.85,40.2 155.85,51.9 162.25,51.9 162.25,59.9
GND on Bottom Layer "GND_L02_P054" (solid, remove dead copper, pour order 54): 26.25,59.9 26.25,40.1 30.75,40.1 30.75,51.9 37.25,51.9 37.25,59.9
NetR2_M1_1 on Bottom Layer "NETR2_M1_1_L02_P058" (solid, remove dead copper, pour order 58): 33.45,50.9 39.25,50.9 39.25,44.1 36.45,41.3 36.45,36.4 33.45,36.4
NetD1_M1_2 on Bottom Layer "NETD1_M1_2_L02_P062" (solid, remove dead copper, pour order 62): 49.75,44 40.05,44 36.95,40.9 36.95,36.4 39.35,36.4 39.35,39.9 42.05,39.9 42.05,37.4 43.05,36.4 49.75,36.4
NetA1.1_M1_1 on Bottom Layer "NETA1.1_M1_1_L02_P066" (solid, remove dead copper, pour order 66): 38.75,59.9 49.75,59.9 49.75,44.9 41.75,44.9 41.75,51.9 38.75,51.9
NetR12_M1_1 on Bottom Layer "NETR12_M1_1_L02_P088" (solid, remove dead copper, pour order 88): 8.45,50.95 14.25,50.95 14.25,44.15 11.35,41.25 11.35,36.45 8.45,36.45
NetD2_M1_2 on Bottom Layer "NETD2_M1_2_L02_P092" (solid, remove dead copper, pour order 92): 24.75,44.05 15.05,44.05 11.95,40.95 11.95,36.45 14.35,36.45 14.35,39.95 17.05,39.95 17.05,37.45 18.05,36.45 24.75,36.45
NetA2.1_M1_1 on Bottom Layer "NETA2.1_M1_1_L02_P096" (solid, remove dead copper, pour order 96): 13.75,59.9 24.75,59.9 24.75,44.9 16.75,44.9 16.75,51.9 13.75,51.9
GND on Bottom Layer "GND_L02_P117" (solid, remove dead copper, pour order 117): 1.25,59.9 1.25,40.1 5.85,40.1 5.85,51.9 12.25,51.9 12.25,59.9
GND on Bottom Layer "GND_L02_P053" (solid, remove dead copper, pour order 53): 76.25,59.9 76.25,40.1 80.75,40.1 80.75,51.9 87.25,51.9 87.25,59.9
NetR2_M2_1 on Bottom Layer "NETR2_M2_1_L02_P057" (solid, remove dead copper, pour order 57): 83.45,50.9 89.25,50.9 89.25,44.1 86.45,41.3 86.45,36.4 83.45,36.4
NetD1_M2_2 on Bottom Layer "NETD1_M2_2_L02_P061" (solid, remove dead copper, pour order 61): 99.75,44 90.05,44 86.95,40.9 86.95,36.4 89.35,36.4 89.35,39.9 92.05,39.9 92.05,37.4 93.05,36.4 99.75,36.4
NetA1.1_M2_1 on Bottom Layer "NETA1.1_M2_1_L02_P065" (solid, remove dead copper, pour order 65): 88.75,59.9 99.75,59.9 99.75,44.9 91.75,44.9 91.75,51.9 88.75,51.9
NetR12_M2_1 on Bottom Layer "NETR12_M2_1_L02_P087" (solid, remove dead copper, pour order 87): 58.45,50.95 64.25,50.95 64.25,44.15 61.35,41.25 61.35,36.45 58.45,36.45
NetD2_M2_2 on Bottom Layer "NETD2_M2_2_L02_P091" (solid, remove dead copper, pour order 91): 74.75,44.05 65.05,44.05 61.95,40.95 61.95,36.45 64.35,36.45 64.35,39.95 67.05,39.95 67.05,37.45 68.05,36.45 74.75,36.45
NetA2.1_M2_1 on Bottom Layer "NETA2.1_M2_1_L02_P095" (solid, remove dead copper, pour order 95): 63.75,59.9 74.75,59.9 74.75,44.9 66.75,44.9 66.75,51.9 63.75,51.9
GND on Bottom Layer "GND_L02_P116" (solid, remove dead copper, pour order 116): 51.25,59.9 51.25,40.1 55.85,40.1 55.85,51.9 62.25,51.9 62.25,59.9
GND on Bottom Layer "GND_L02_P115" (solid, remove dead copper, pour order 115): 101.25,59.9 101.25,40.1 105.85,40.1 105.85,51.9 112.25,51.9 112.25,59.9
NetA2.1_M3_1 on Bottom Layer "NETA2.1_M3_1_L02_P094" (solid, remove dead copper, pour order 94): 113.75,59.9 124.75,59.9 124.75,44.9 116.75,44.9 116.75,51.9 113.75,51.9
NetD2_M3_2 on Bottom Layer "NETD2_M3_2_L02_P090" (solid, remove dead copper, pour order 90): 124.75,44.05 115.05,44.05 111.95,40.95 111.95,36.45 114.35,36.45 114.35,39.95 117.05,39.95 117.05,37.45 118.05,36.45 124.75,36.45
NetR12_M3_1 on Bottom Layer "NETR12_M3_1_L02_P086" (solid, remove dead copper, pour order 86): 108.45,50.95 114.25,50.95 114.25,44.15 111.35,41.25 111.35,36.45 108.45,36.45
NetA1.1_M3_1 on Bottom Layer "NETA1.1_M3_1_L02_P064" (solid, remove dead copper, pour order 64): 138.75,59.9 149.75,59.9 149.75,44.9 141.75,44.9 141.75,51.9 138.75,51.9
NetD1_M3_2 on Bottom Layer "NETD1_M3_2_L02_P060" (solid, remove dead copper, pour order 60): 149.75,44 140.05,44 136.95,40.9 136.95,36.4 139.35,36.4 139.35,39.9 142.05,39.9 142.05,37.4 143.05,36.4 149.75,36.4
NetR2_M3_1 on Bottom Layer "NETR2_M3_1_L02_P056" (solid, remove dead copper, pour order 56): 133.45,50.9 139.25,50.9 139.25,44.1 136.45,41.3 136.45,36.4 133.45,36.4
GND on Bottom Layer "GND_L02_P052" (solid, remove dead copper, pour order 52): 126.25,59.9 126.25,40.1 130.75,40.1 130.75,51.9 137.25,51.9 137.25,59.9
GND on Bottom Layer "GND_L02_P085" (solid, remove dead copper, pour order 85): 51.25,59.9 51.25,40.4 55.8,40.4 55.8,51.9 62.25,51.9 62.25,59.9
GND on Bottom Layer "GND_L02_P084" (solid, remove dead copper, pour order 84): 1.25,59.9 1.25,40.4 5.8,40.4 5.8,51.9 12.25,51.9 12.25,59.9
GND on Top Layer "NONET_L01_P121" (solid, remove dead copper, shelved, pour order 121): 1,1 1,23.9 200,23.9 200,1
GND on Top Layer "GND_L01_P098" (solid, remove dead copper, pour order 98): 1.2,59.9 12.25,59.9 12.25,51.9 6.7,51.9 6.7,40.1 1.2,40.1
GND on Top Layer "NONET_L01_P120" (solid, remove dead copper, shelved, pour order 120): -0.2,11.2 201.2,11.2 201.2,34.9 -0.2,34.9
GND on Top Layer "GND_L01_P114" (solid, remove dead copper, pour order 114): 151.25,59.9 162.25,59.9 162.25,51.9 156.75,51.9 156.75,40.2 151.25,40.2
GND on Top Layer "GND_L01_P071" (solid, remove dead copper, pour order 71): 176.25,59.9 187.25,59.9 187.25,51.9 181.75,51.9 181.75,40.2 176.25,40.2
NetR2_M4_1 on Top Layer "NETR2_M4_1_L01_P075" (solid, remove dead copper, pour order 75): 186.45,36.4 186.45,41.3 189.25,44.1 189.25,50.9 182.75,50.9 182.75,36.4
NetD1_M4_2 on Top Layer "NETD1_M4_2_L01_P079" (solid, remove dead copper, pour order 79): 199.75,44 190.05,44 186.95,40.9 186.95,36.4 189.35,36.4 189.35,39.9 192.05,39.9 192.05,36.4 199.75,36.4
NetA1.1_M4_1 on Top Layer "NETA1.1_M4_1_L01_P083" (solid, remove dead copper, pour order 83): 188.75,59.9 199.75,59.9 199.75,44.9 191.75,44.9 191.75,51.9 188.75,51.9
NetD2_M4_2 on Top Layer "NETD2_M4_2_L01_P102" (solid, remove dead copper, pour order 102): 174.75,44.05 165.05,44.05 161.95,40.95 161.95,36.45 164.35,36.45 164.35,39.95 167.05,39.95 167.05,36.45 174.75,36.45
NetR12_M4_1 on Top Layer "NETR12_M4_1_L01_P106" (solid, remove dead copper, pour order 106): 161.45,36.45 161.45,41.35 164.25,44.15 164.25,50.95 157.75,50.95 157.75,36.45
NetA2.1_M4_1 on Top Layer "NETA2.1_M4_1_L01_P110" (solid, remove dead copper, pour order 110): 163.75,59.9 174.75,59.9 174.75,44.9 166.75,44.9 166.75,51.9 163.75,51.9
GND on Top Layer "GND_L01_P113" (solid, remove dead copper, pour order 113): 1.25,59.9 12.25,59.9 12.25,51.9 6.75,51.9 6.75,40.4 1.25,40.4
GND on Top Layer "GND_L01_P070" (solid, remove dead copper, pour order 70): 26.25,59.9 37.25,59.9 37.25,51.9 31.75,51.9 31.75,40.1 26.25,40.1
NetR2_M1_1 on Top Layer "NETR2_M1_1_L01_P074" (solid, remove dead copper, pour order 74): 36.45,36.4 36.45,41.3 39.25,44.1 39.25,50.9 32.75,50.9 32.75,36.4
NetD1_M1_2 on Top Layer "NETD1_M1_2_L01_P078" (solid, remove dead copper, pour order 78): 49.75,44 40.05,44 36.95,40.9 36.95,36.4 39.35,36.4 39.35,39.9 42.05,39.9 42.05,36.4 49.75,36.4
NetA1.1_M1_1 on Top Layer "NETA1.1_M1_1_L01_P082" (solid, remove dead copper, pour order 82): 38.75,59.9 49.75,59.9 49.75,44.9 41.75,44.9 41.75,51.9 38.75,51.9
NetD2_M1_2 on Top Layer "NETD2_M1_2_L01_P101" (solid, remove dead copper, pour order 101): 24.75,44.05 15.05,44.05 11.95,40.95 11.95,36.45 14.35,36.45 14.35,39.95 17.05,39.95 17.05,36.45 24.75,36.45
NetR12_M1_1 on Top Layer "NETR12_M1_1_L01_P105" (solid, remove dead copper, pour order 105): 11.45,36.45 11.45,41.35 14.25,44.15 14.25,50.95 7.75,50.95 7.75,36.45
NetA2.1_M1_1 on Top Layer "NETA2.1_M1_1_L01_P109" (solid, remove dead copper, pour order 109): 13.75,59.9 24.75,59.9 24.75,44.9 16.75,44.9 16.75,51.9 13.75,51.9
GND on Top Layer "GND_L01_P112" (solid, remove dead copper, pour order 112): 51.25,59.9 62.25,59.9 62.25,51.9 56.75,51.9 56.75,40.1 51.25,40.1
GND on Top Layer "GND_L01_P069" (solid, remove dead copper, pour order 69): 76.25,59.9 87.25,59.9 87.25,51.9 81.75,51.9 81.75,40.1 76.25,40.1
NetR2_M2_1 on Top Layer "NETR2_M2_1_L01_P073" (solid, remove dead copper, pour order 73): 86.45,36.4 86.45,41.3 89.25,44.1 89.25,50.9 82.75,50.9 82.75,36.4
NetD1_M2_2 on Top Layer "NETD1_M2_2_L01_P077" (solid, remove dead copper, pour order 77): 99.75,44 90.05,44 86.95,40.9 86.95,36.4 89.35,36.4 89.35,39.9 92.05,39.9 92.05,36.4 99.75,36.4
NetA1.1_M2_1 on Top Layer "NETA1.1_M2_1_L01_P081" (solid, remove dead copper, pour order 81): 88.75,59.9 99.75,59.9 99.75,44.9 91.75,44.9 91.75,51.9 88.75,51.9
NetD2_M2_2 on Top Layer "NETD2_M2_2_L01_P100" (solid, remove dead copper, pour order 100): 74.75,44.05 65.05,44.05 61.95,40.95 61.95,36.45 64.35,36.45 64.35,39.95 67.05,39.95 67.05,36.45 74.75,36.45
NetR12_M2_1 on Top Layer "NETR12_M2_1_L01_P104" (solid, remove dead copper, pour order 104): 61.45,36.45 61.45,41.35 64.25,44.15 64.25,50.95 57.75,50.95 57.75,36.45
NetA2.1_M2_1 on Top Layer "NETA2.1_M2_1_L01_P108" (solid, remove dead copper, pour order 108): 63.75,59.9 74.75,59.9 74.75,44.9 66.75,44.9 66.75,51.9 63.75,51.9
NetA2.1_M3_1 on Top Layer "NETA2.1_M3_1_L01_P107" (solid, remove dead copper, pour order 107): 113.75,59.9 124.75,59.9 124.75,44.9 116.75,44.9 116.75,51.9 113.75,51.9
NetR12_M3_1 on Top Layer "NETR12_M3_1_L01_P103" (solid, remove dead copper, pour order 103): 111.45,36.45 111.45,41.35 114.25,44.15 114.25,50.95 107.75,50.95 107.75,36.45
NetD2_M3_2 on Top Layer "NETD2_M3_2_L01_P099" (solid, remove dead copper, pour order 99): 124.75,44.05 115.05,44.05 111.95,40.95 111.95,36.45 114.35,36.45 114.35,39.95 117.05,39.95 117.05,36.45 124.75,36.45
NetA1.1_M3_1 on Top Layer "NETA1.1_M3_1_L01_P080" (solid, remove dead copper, pour order 80): 138.75,59.9 149.75,59.9 149.75,44.9 141.75,44.9 141.75,51.9 138.75,51.9
NetD1_M3_2 on Top Layer "NETD1_M3_2_L01_P076" (solid, remove dead copper, pour order 76): 149.75,44 140.05,44 136.95,40.9 136.95,36.4 139.35,36.4 139.35,39.9 142.05,39.9 142.05,36.4 149.75,36.4
NetR2_M3_1 on Top Layer "NETR2_M3_1_L01_P072" (solid, remove dead copper, pour order 72): 136.45,36.4 136.45,41.3 139.25,44.1 139.25,50.9 132.75,50.9 132.75,36.4
GND on Top Layer "GND_L01_P068" (solid, remove dead copper, pour order 68): 126.25,59.9 137.25,59.9 137.25,51.9 131.75,51.9 131.75,40.1 126.25,40.1
GND on Top Layer "GND_L01_P111" (solid, remove dead copper, pour order 111): 101.25,59.9 112.25,59.9 112.25,51.9 106.75,51.9 106.75,40.1 101.25,40.1

## Other copper
Bottom Layer:
  pour cut-out: 162.95,30.15 cw(c162.95,32.65) 160.45,32.65 cw(c162.95,32.65) 162.95,35.15 cw(c162.95,32.65) 165.45,32.65 cw(c162.95,32.65)
  pour cut-out: 187.95,30.1 cw(c187.95,32.6) 185.45,32.6 cw(c187.95,32.6) 187.95,35.1 cw(c187.95,32.6) 190.45,32.6 cw(c187.95,32.6)
  pour cut-out: 137.95,30.1 cw(c137.95,32.6) 135.45,32.6 cw(c137.95,32.6) 137.95,35.1 cw(c137.95,32.6) 140.45,32.6 cw(c137.95,32.6)
  pour cut-out: 112.95,30.15 cw(c112.95,32.65) 110.45,32.65 cw(c112.95,32.65) 112.95,35.15 cw(c112.95,32.65) 115.45,32.65 cw(c112.95,32.65)
  pour cut-out: 87.95,30.1 cw(c87.95,32.6) 85.45,32.6 cw(c87.95,32.6) 87.95,35.1 cw(c87.95,32.6) 90.45,32.6 cw(c87.95,32.6)
  pour cut-out: 62.95,30.15 cw(c62.95,32.65) 60.45,32.65 cw(c62.95,32.65) 62.95,35.15 cw(c62.95,32.65) 65.45,32.65 cw(c62.95,32.65)
  pour cut-out: 37.95,30.1 cw(c37.95,32.6) 35.45,32.6 cw(c37.95,32.6) 37.95,35.1 cw(c37.95,32.6) 40.45,32.6 cw(c37.95,32.6)
  pour cut-out: 12.95,30.1 cw(c12.95,32.6) 10.45,32.6 cw(c12.95,32.6) 12.95,35.1 cw(c12.95,32.6) 15.45,32.6 cw(c12.95,32.6)

## Silkscreen, mask and mechanical layers (free items; w line width, h text height)
Top Overlay:
  lines w0.5: 1.5,27.15 1.5,43.15 ; 1.5,27.15 1.5,43.15 ; 1.5,27.15 1.5,43.15 ; 1.5,27.15 1.5,43.15 ; 1.5,27.15 1.5,43.15 ; 1.5,27.15 1.5,43.15 ; 1.5,35.15 24.5,35.15 ; 1.5,35.15 24.5,35.15 ; 1.5,35.15 24.5,35.15 ; 1.5,35.15 24.5,35.15 ; 1.5,35.15 24.5,35.15 ; 1.5,35.15 24.5,35.15 ; 24.5,27.15 24.5,43.15 ; 24.5,27.15 24.5,43.15 ; 24.5,27.15 24.5,43.15 ; 24.5,27.15 24.5,43.15 ; 24.5,27.15 24.5,43.15 ; 24.5,27.15 24.5,43.15 ; 26.5,27.15 26.5,43.15 ; 26.5,27.15 26.5,43.15 ; 26.5,27.15 26.5,43.15 ; 26.5,27.15 26.5,43.15 ; 26.5,27.15 26.5,43.15 ; 26.5,27.15 26.5,43.15 ; 26.5,35.15 49.5,35.15 ; 26.5,35.15 49.5,35.15 ; 26.5,35.15 49.5,35.15 ; 26.5,35.15 49.5,35.15 ; 26.5,35.15 49.5,35.15 ; 26.5,35.15 49.5,35.15 ; 49.5,27.15 49.5,43.15 ; 49.5,27.15 49.5,43.15 ; 49.5,27.15 49.5,43.15 ; 49.5,27.15 49.5,43.15 ; 49.5,27.15 49.5,43.15 ; 49.5,27.15 49.5,43.15 ; 51.5,27.15 51.5,43.15 ; 51.5,27.15 51.5,43.15 ; 51.5,27.15 51.5,43.15 ; 51.5,27.15 51.5,43.15 ; 51.5,27.15 51.5,43.15 ; 51.5,35.15 74.5,35.15 ; 51.5,35.15 74.5,35.15 ; 51.5,35.15 74.5,35.15 ; 51.5,35.15 74.5,35.15 ; 51.5,35.15 74.5,35.15 ; 74.5,27.15 74.5,43.15 ; 74.5,27.15 74.5,43.15 ; 74.5,27.15 74.5,43.15 ; 74.5,27.15 74.5,43.15 ; 74.5,27.15 74.5,43.15 ; 76.5,27.15 76.5,43.15 ; 76.5,27.15 76.5,43.15 ; 76.5,27.15 76.5,43.15 ; 76.5,27.15 76.5,43.15 ; 76.5,27.15 76.5,43.15 ; 76.5,35.15 99.5,35.15 ; 76.5,35.15 99.5,35.15 ; 76.5,35.15 99.5,35.15 ; 76.5,35.15 99.5,35.15 ; 76.5,35.15 99.5,35.15 ; 99.5,27.15 99.5,43.15 ; 99.5,27.15 99.5,43.15 ; 99.5,27.15 99.5,43.15 ; 99.5,27.15 99.5,43.15 ; 99.5,27.15 99.5,43.15 ; 101.5,27.15 101.5,43.15 ; 101.5,27.15 101.5,43.15 ; 101.5,27.15 101.5,43.15 ; 101.5,35.15 124.5,35.15 ; 101.5,35.15 124.5,35.15 ; 101.5,35.15 124.5,35.15 ; 124.5,27.15 124.5,43.15 ; 124.5,27.15 124.5,43.15 ; 124.5,27.15 124.5,43.15 ; 126.5,27.15 126.5,43.15 ; 126.5,27.15 126.5,43.15 ; 126.5,27.15 126.5,43.15 ; 126.5,35.15 149.5,35.15 ; 126.5,35.15 149.5,35.15 ; 126.5,35.15 149.5,35.15 ; 149.5,27.15 149.5,43.15 ; 149.5,27.15 149.5,43.15 ; 149.5,27.15 149.5,43.15 ; 151.5,27.15 151.5,43.15 ; 151.5,27.15 151.5,43.15 ; 151.5,27.15 151.5,43.15 ; 151.5,27.15 151.5,43.15 ; 151.5,35.15 174.5,35.15 ; 151.5,35.15 174.5,35.15 ; 151.5,35.15 174.5,35.15 ; 151.5,35.15 174.5,35.15 ; 174.5,27.15 174.5,43.15 ; 174.5,27.15 174.5,43.15 ; 174.5,27.15 174.5,43.15 ; 174.5,27.15 174.5,43.15 ; 176.5,27.15 176.5,43.15 ; 176.5,27.15 176.5,43.15 ; 176.5,27.15 176.5,43.15 ; 176.5,27.15 176.5,43.15 ; 176.5,35.15 199.5,35.15 ; 176.5,35.15 199.5,35.15 ; 176.5,35.15 199.5,35.15 ; 176.5,35.15 199.5,35.15 ; 199.5,27.15 199.5,43.15 ; 199.5,27.15 199.5,43.15 ; 199.5,27.15 199.5,43.15 ; 199.5,27.15 199.5,43.15
Mechanical 1:
  pour cut-out: 12.95,30.1 cw(c12.95,32.6) 10.45,32.6 cw(c12.95,32.6) 12.95,35.1 cw(c12.95,32.6) 15.45,32.6 cw(c12.95,32.6)
  pour cut-out: 12.95,30.1 cw(c12.95,32.6) 10.45,32.6 cw(c12.95,32.6) 12.95,35.1 cw(c12.95,32.6) 15.45,32.6 cw(c12.95,32.6)